# EAGLE board Qwiic Distance Sensor - VL53L1X-Panel (EAGLE 7.7.0)
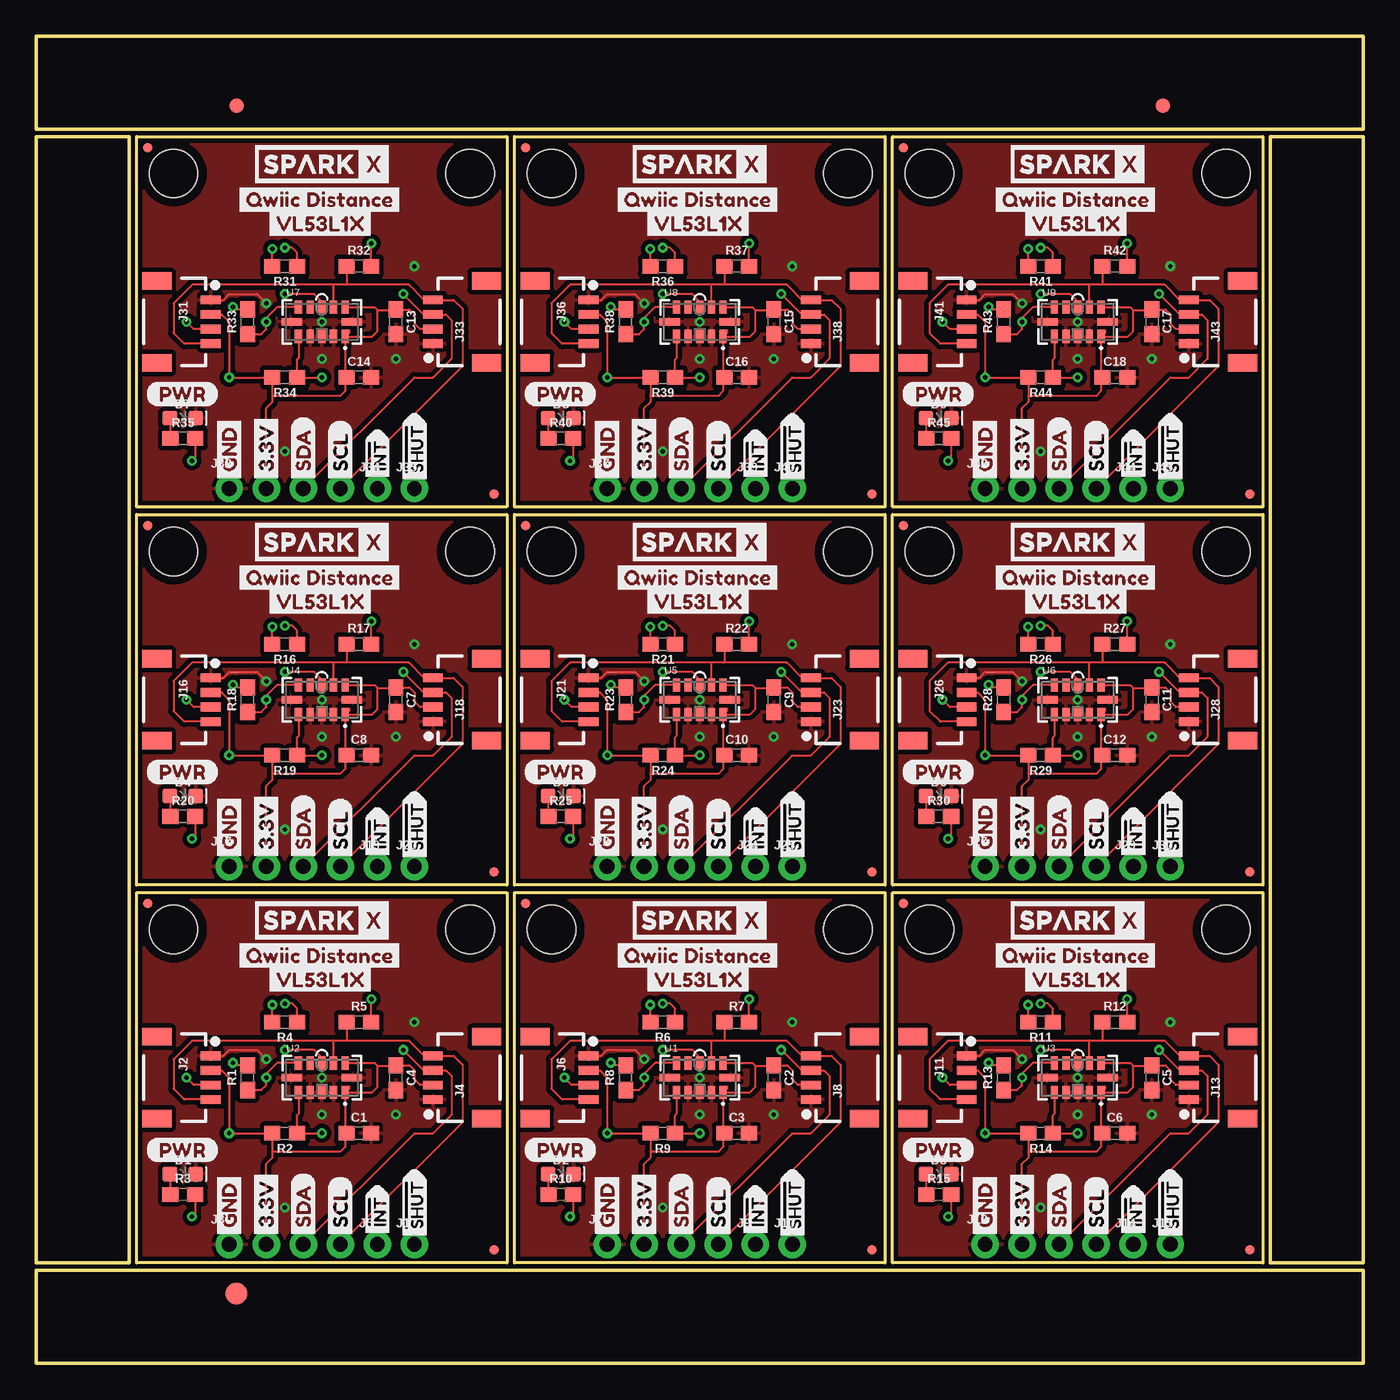
[diagram p0: board, top side]
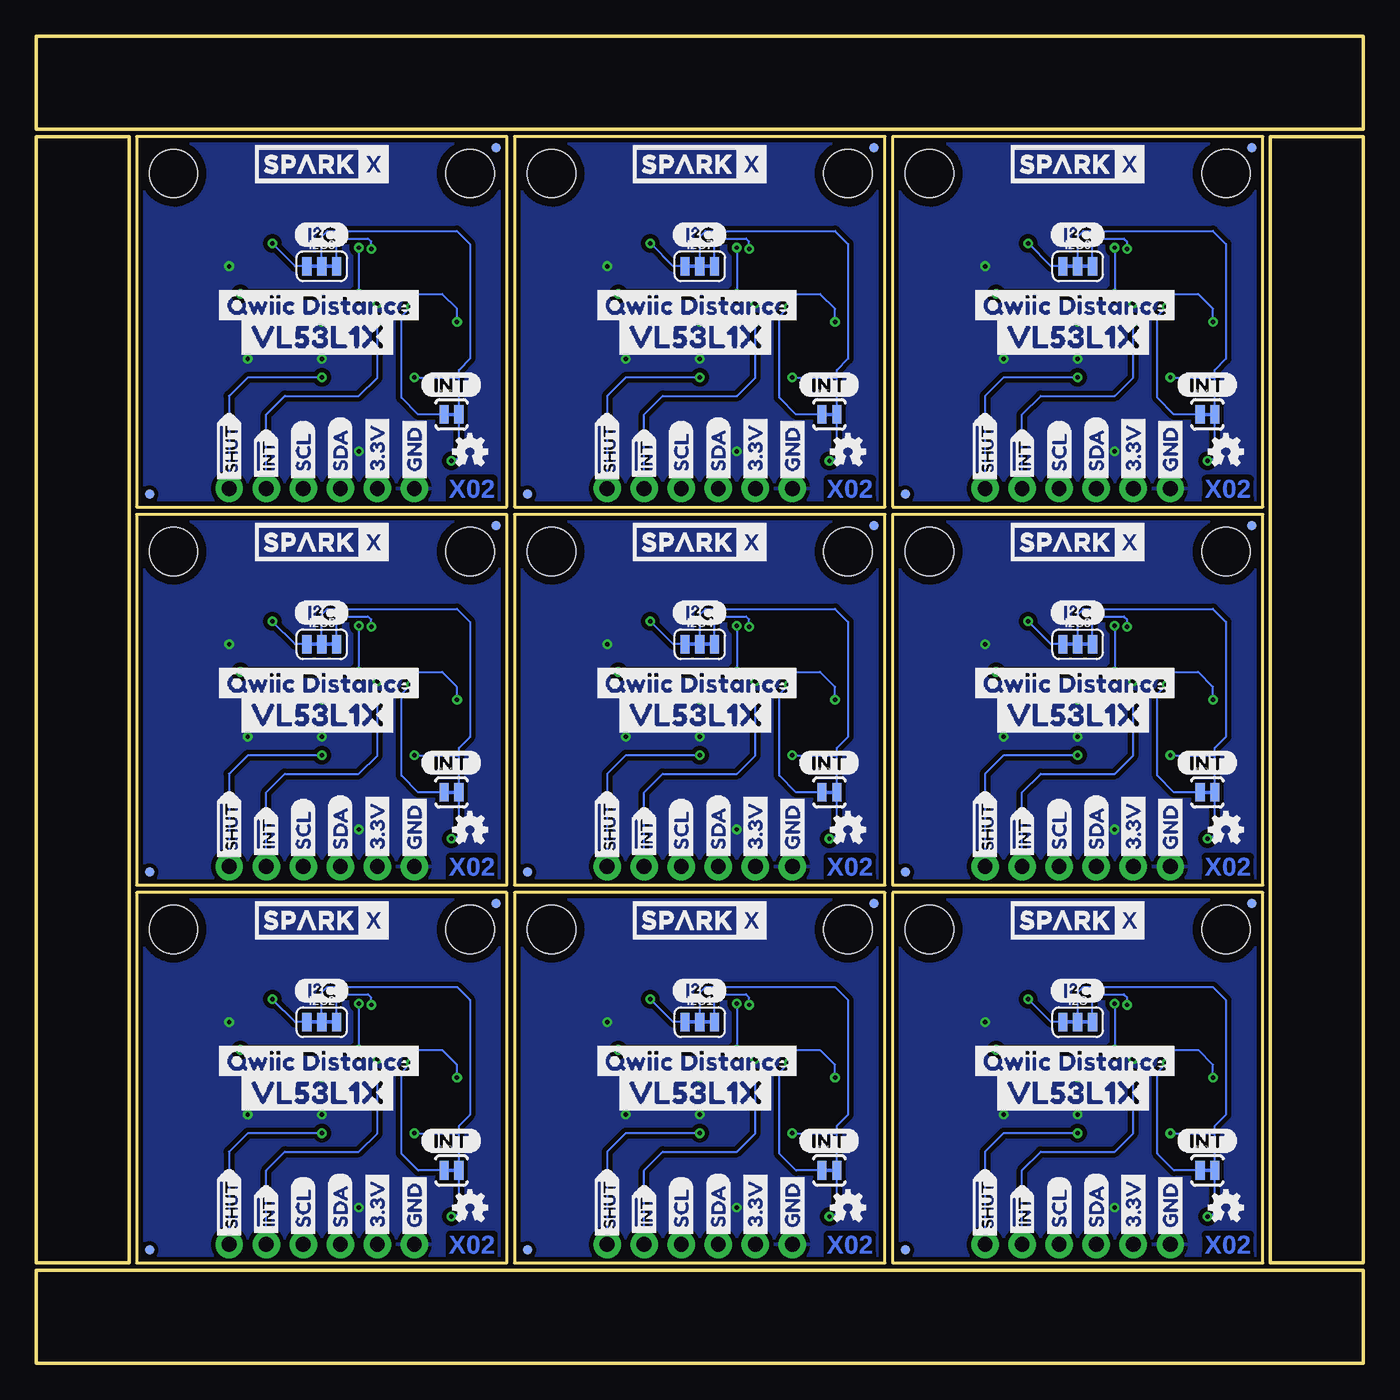
[diagram p1: board, bottom side, seen from below]

Size 90.93 x 90.93 mm. Coordinates in mm from the lower left corner, seen from the top.
Outline: 6.86,6.86 6.86,32.26 32.26,32.26 32.26,6.86 6.86,6.86
Outline: 32.77,6.86 32.77,32.26 58.17,32.26 58.17,6.86 32.77,6.86
Outline: 58.67,6.86 58.67,32.26 84.07,32.26 84.07,6.86 58.67,6.86
Outline: 6.86,32.77 6.86,58.17 32.26,58.17 32.26,32.77 6.86,32.77
Outline: 32.77,32.77 32.77,58.17 58.17,58.17 58.17,32.77 32.77,32.77
Outline: 58.67,32.77 58.67,58.17 84.07,58.17 84.07,32.77 58.67,32.77
Outline: 6.86,58.67 6.86,84.07 32.26,84.07 32.26,58.67 6.86,58.67
Outline: 32.77,58.67 32.77,84.07 58.17,84.07 58.17,58.67 32.77,58.67
Outline: 58.67,58.67 58.67,84.07 84.07,84.07 84.07,58.67 58.67,58.67
Outline: 0,6.35 90.93,6.35 90.93,0 0,0 0,6.35
Outline: 84.58,84.07 90.93,84.07 90.93,6.86 84.58,6.86 84.58,84.07
Outline: 0,90.93 90.93,90.93 90.93,84.58 0,84.58 0,90.93
Outline: 0,84.07 6.35,84.07 6.35,6.86 0,6.86 0,84.07
Copper layers (1*16): Top 0.035mm / dielectric 1.5mm / Bottom 0.035mm
Design rules "SparkFun-2-layer-PCBWay-LIMIT": minimum track width 6mil, minimum drill 0.3mm, track to track 6mil, track to pad 6mil, pad to pad 6mil, via to via 6mil, smd to smd 6mil, copper to edge 6mil, drill to drill 6mil, minimum pad ring 7mil, minimum via ring 7mil, stop-mask expansion 4mil, vias tented up to drill 25mil, thermal gap 10mil

## Footprints (pad centres in the part's own frame; a part is rotated, then mirrored left to right if it is on the bottom)
0603 = smd 1.1 x 1: 1 -0.85,0; 2 0.85,0
LED-0603 = smd 1 x 1: A -0.877,0; C 0.877,0
FIDUCIAL-1X2 = smd 1 x 1: 1 0,0
FIDUCIAL-1.5X3 = smd 1.5 x 1.5: 1 0,0
SMT-JUMPER_3_2-NC_TRACE_SILK = smd 0.635 x 1.27: 1 -1.016,0; 2 0,0; 3 1.016,0
1X01_NO_SILK = drill 1.016 pad 1.88: 1 0,0
1X04_1MM_RA = smd 0.6 x 1.35: 1 -1.5,0; 2 -0.5,0; 3 0.5,0; 4 1.5,0 | smd 1.2 x 2: NC1 2.8,-3.675; NC2 -2.8,-3.675
1X04_NO_SILK = drill 1.016 pad 1.88: 1 0,0; 2 2.54,0; 3 5.08,0; 4 7.62,0
MICRO-FIDUCIAL = smd 0.635 x 0.635: 1 0,0
STAND-OFF = hole 3.302: 0,0
PAD-JUMPER-2-NC_BY_TRACE_YES_SILK = smd 0.635 x 1.27: 1 -0.508,0; 2 0.508,0
VL53L1X = smd 0.5 x 0.9: 1 1.6,-1; 2 0.8,-1; 3 0,-1; 4 -0.8,-1; 5 -1.6,-1; 7 -1.6,1; 8 -0.8,1; 9 0,1; 10 0.8,1; 11 1.6,1 | smd 1.4 x 0.5: 6 -2.05,0; 12 2.05,0

## Placement (x,y rotation side)
C1  4.7uF  [0603]  22.1,15.75 0 top
C2  0.1uF  [0603]  50.55,19.56 270 top
C3  4.7uF  [0603]  48.01,15.75 0 top
C4  0.1uF  [0603]  24.64,19.56 270 top
C5  0.1uF  [0603]  76.45,19.56 270 top
C6  4.7uF  [0603]  73.91,15.75 0 top
C7  0.1uF  [0603]  24.64,45.47 270 top
C8  4.7uF  [0603]  22.1,41.66 0 top
C9  0.1uF  [0603]  50.55,45.47 270 top
C10  4.7uF  [0603]  48.01,41.66 0 top
C11  0.1uF  [0603]  76.45,45.47 270 top
C12  4.7uF  [0603]  73.91,41.66 0 top
C13  0.1uF  [0603]  24.64,71.37 270 top
C14  4.7uF  [0603]  22.1,67.56 0 top
C15  0.1uF  [0603]  50.55,71.37 270 top
C16  4.7uF  [0603]  48.01,67.56 0 top
C17  0.1uF  [0603]  76.45,71.37 270 top
C18  4.7uF  [0603]  73.91,67.56 0 top
D1  RED  [LED-0603]  10.03,12.95 0 top
D2  RED  [LED-0603]  35.94,12.95 0 top
D3  RED  [LED-0603]  61.85,12.95 0 top
D4  RED  [LED-0603]  10.03,38.86 0 top
D5  RED  [LED-0603]  35.94,38.86 0 top
D6  RED  [LED-0603]  61.85,38.86 0 top
D7  RED  [LED-0603]  10.03,64.77 0 top
D8  RED  [LED-0603]  35.94,64.77 0 top
D9  RED  [LED-0603]  61.85,64.77 0 top
E$1  [FIDUCIAL-1X2]  13.72,86.17 0 top
E$2  [FIDUCIAL-1X2]  77.22,86.17 0 top
E$3  [FIDUCIAL-1.5X3]  13.72,4.76 0 top
I2C  [SMT-JUMPER_3_2-NC_TRACE_SILK]  19.56,23.37 0 bottom
I2C1  [SMT-JUMPER_3_2-NC_TRACE_SILK]  45.47,23.37 0 bottom
I2C2  [SMT-JUMPER_3_2-NC_TRACE_SILK]  71.37,23.37 0 bottom
I2C3  [SMT-JUMPER_3_2-NC_TRACE_SILK]  19.56,49.28 0 bottom
I2C4  [SMT-JUMPER_3_2-NC_TRACE_SILK]  45.47,49.28 0 bottom
I2C5  [SMT-JUMPER_3_2-NC_TRACE_SILK]  71.37,49.28 0 bottom
I2C6  [SMT-JUMPER_3_2-NC_TRACE_SILK]  19.56,75.18 0 bottom
I2C7  [SMT-JUMPER_3_2-NC_TRACE_SILK]  45.47,75.18 0 bottom
I2C8  [SMT-JUMPER_3_2-NC_TRACE_SILK]  71.37,75.18 0 bottom
J1  [1X01_NO_SILK]  25.91,8.13 0 top
J2  SMD  [1X04_1MM_RA]  11.94,19.56 270 top
J3  PTH  [1X04_NO_SILK]  13.21,8.13 0 top
J4  SMD  [1X04_1MM_RA]  27.18,19.56 90 top
J5  [1X01_NO_SILK]  23.37,8.13 0 top
J6  SMD  [1X04_1MM_RA]  37.85,19.56 270 top
J7  PTH  [1X04_NO_SILK]  39.12,8.13 0 top
J8  SMD  [1X04_1MM_RA]  53.09,19.56 90 top
J9  [1X01_NO_SILK]  49.28,8.13 0 top
J10  [1X01_NO_SILK]  51.82,8.13 0 top
J11  SMD  [1X04_1MM_RA]  63.75,19.56 270 top
J12  PTH  [1X04_NO_SILK]  65.02,8.13 0 top
J13  SMD  [1X04_1MM_RA]  78.99,19.56 90 top
J14  [1X01_NO_SILK]  75.18,8.13 0 top
J15  [1X01_NO_SILK]  77.72,8.13 0 top
J16  SMD  [1X04_1MM_RA]  11.94,45.47 270 top
J17  PTH  [1X04_NO_SILK]  13.21,34.04 0 top
J18  SMD  [1X04_1MM_RA]  27.18,45.47 90 top
J19  [1X01_NO_SILK]  23.37,34.04 0 top
J20  [1X01_NO_SILK]  25.91,34.04 0 top
J21  SMD  [1X04_1MM_RA]  37.85,45.47 270 top
J22  PTH  [1X04_NO_SILK]  39.12,34.04 0 top
J23  SMD  [1X04_1MM_RA]  53.09,45.47 90 top
J24  [1X01_NO_SILK]  49.28,34.04 0 top
J25  [1X01_NO_SILK]  51.82,34.04 0 top
J26  SMD  [1X04_1MM_RA]  63.75,45.47 270 top
J27  PTH  [1X04_NO_SILK]  65.02,34.04 0 top
J28  SMD  [1X04_1MM_RA]  78.99,45.47 90 top
J29  [1X01_NO_SILK]  75.18,34.04 0 top
J30  [1X01_NO_SILK]  77.72,34.04 0 top
J31  SMD  [1X04_1MM_RA]  11.94,71.37 270 top
J32  PTH  [1X04_NO_SILK]  13.21,59.94 0 top
J33  SMD  [1X04_1MM_RA]  27.18,71.37 90 top
J34  [1X01_NO_SILK]  23.37,59.94 0 top
J35  [1X01_NO_SILK]  25.91,59.94 0 top
J36  SMD  [1X04_1MM_RA]  37.85,71.37 270 top
J37  PTH  [1X04_NO_SILK]  39.12,59.94 0 top
J38  SMD  [1X04_1MM_RA]  53.09,71.37 90 top
J39  [1X01_NO_SILK]  49.28,59.94 0 top
J40  [1X01_NO_SILK]  51.82,59.94 0 top
J41  SMD  [1X04_1MM_RA]  63.75,71.37 270 top
J42  PTH  [1X04_NO_SILK]  65.02,59.94 0 top
J43  SMD  [1X04_1MM_RA]  78.99,71.37 90 top
J44  [1X01_NO_SILK]  75.18,59.94 0 top
J45  [1X01_NO_SILK]  77.72,59.94 0 top
JP1  FIDUCIALUFIDUCIAL  [MICRO-FIDUCIAL]  7.62,31.5 0 bottom
JP2  FIDUCIALUFIDUCIAL  [MICRO-FIDUCIAL]  31.37,7.75 0 top
JP3  STAND-OFF  [STAND-OFF]  9.4,29.72 0 top
JP4  STAND-OFF  [STAND-OFF]  29.72,29.72 0 top
JP5  FIDUCIALUFIDUCIAL  [MICRO-FIDUCIAL]  31.37,7.75 0 bottom
JP6  FIDUCIALUFIDUCIAL  [MICRO-FIDUCIAL]  7.62,31.5 0 top
JP7  STAND-OFF  [STAND-OFF]  35.31,29.72 0 top
JP8  STAND-OFF  [STAND-OFF]  55.63,29.72 0 top
JP9  INT  [PAD-JUMPER-2-NC_BY_TRACE_YES_SILK]  10.67,13.21 0 bottom
JP10  FIDUCIALUFIDUCIAL  [MICRO-FIDUCIAL]  57.28,7.75 0 top
JP11  FIDUCIALUFIDUCIAL  [MICRO-FIDUCIAL]  33.53,31.5 0 top
JP12  FIDUCIALUFIDUCIAL  [MICRO-FIDUCIAL]  33.53,31.5 0 bottom
JP13  FIDUCIALUFIDUCIAL  [MICRO-FIDUCIAL]  57.28,7.75 0 bottom
JP14  INT  [PAD-JUMPER-2-NC_BY_TRACE_YES_SILK]  36.58,13.21 0 bottom
JP15  STAND-OFF  [STAND-OFF]  61.21,29.72 0 top
JP16  STAND-OFF  [STAND-OFF]  81.53,29.72 0 top
JP17  FIDUCIALUFIDUCIAL  [MICRO-FIDUCIAL]  83.19,7.75 0 top
JP18  FIDUCIALUFIDUCIAL  [MICRO-FIDUCIAL]  59.44,31.5 0 top
JP19  FIDUCIALUFIDUCIAL  [MICRO-FIDUCIAL]  59.44,31.5 0 bottom
JP20  FIDUCIALUFIDUCIAL  [MICRO-FIDUCIAL]  83.19,7.75 0 bottom
JP21  INT  [PAD-JUMPER-2-NC_BY_TRACE_YES_SILK]  62.48,13.21 0 bottom
JP22  STAND-OFF  [STAND-OFF]  9.4,55.63 0 top
JP23  STAND-OFF  [STAND-OFF]  29.72,55.63 0 top
JP24  FIDUCIALUFIDUCIAL  [MICRO-FIDUCIAL]  31.37,33.66 0 top
JP25  FIDUCIALUFIDUCIAL  [MICRO-FIDUCIAL]  7.62,57.4 0 top
JP26  FIDUCIALUFIDUCIAL  [MICRO-FIDUCIAL]  7.62,57.4 0 bottom
JP27  FIDUCIALUFIDUCIAL  [MICRO-FIDUCIAL]  31.37,33.66 0 bottom
JP28  INT  [PAD-JUMPER-2-NC_BY_TRACE_YES_SILK]  10.67,39.12 0 bottom
JP29  STAND-OFF  [STAND-OFF]  35.31,55.63 0 top
JP30  STAND-OFF  [STAND-OFF]  55.63,55.63 0 top
JP31  FIDUCIALUFIDUCIAL  [MICRO-FIDUCIAL]  57.28,33.66 0 top
JP32  FIDUCIALUFIDUCIAL  [MICRO-FIDUCIAL]  33.53,57.4 0 top
JP33  FIDUCIALUFIDUCIAL  [MICRO-FIDUCIAL]  33.53,57.4 0 bottom
JP34  FIDUCIALUFIDUCIAL  [MICRO-FIDUCIAL]  57.28,33.66 0 bottom
JP35  INT  [PAD-JUMPER-2-NC_BY_TRACE_YES_SILK]  36.58,39.12 0 bottom
JP36  STAND-OFF  [STAND-OFF]  61.21,55.63 0 top
JP37  STAND-OFF  [STAND-OFF]  81.53,55.63 0 top
JP38  FIDUCIALUFIDUCIAL  [MICRO-FIDUCIAL]  83.19,33.66 0 top
JP39  FIDUCIALUFIDUCIAL  [MICRO-FIDUCIAL]  59.44,57.4 0 top
JP40  FIDUCIALUFIDUCIAL  [MICRO-FIDUCIAL]  59.44,57.4 0 bottom
JP41  FIDUCIALUFIDUCIAL  [MICRO-FIDUCIAL]  83.19,33.66 0 bottom
JP42  INT  [PAD-JUMPER-2-NC_BY_TRACE_YES_SILK]  62.48,39.12 0 bottom
JP43  STAND-OFF  [STAND-OFF]  9.4,81.53 0 top
JP44  STAND-OFF  [STAND-OFF]  29.72,81.53 0 top
JP45  FIDUCIALUFIDUCIAL  [MICRO-FIDUCIAL]  31.37,59.56 0 top
JP46  FIDUCIALUFIDUCIAL  [MICRO-FIDUCIAL]  7.62,83.31 0 top
JP47  FIDUCIALUFIDUCIAL  [MICRO-FIDUCIAL]  7.62,83.31 0 bottom
JP48  FIDUCIALUFIDUCIAL  [MICRO-FIDUCIAL]  31.37,59.56 0 bottom
JP49  INT  [PAD-JUMPER-2-NC_BY_TRACE_YES_SILK]  10.67,65.02 0 bottom
JP50  STAND-OFF  [STAND-OFF]  35.31,81.53 0 top
JP51  STAND-OFF  [STAND-OFF]  55.63,81.53 0 top
JP52  FIDUCIALUFIDUCIAL  [MICRO-FIDUCIAL]  57.28,59.56 0 top
JP53  FIDUCIALUFIDUCIAL  [MICRO-FIDUCIAL]  33.53,83.31 0 top
JP54  FIDUCIALUFIDUCIAL  [MICRO-FIDUCIAL]  33.53,83.31 0 bottom
JP55  FIDUCIALUFIDUCIAL  [MICRO-FIDUCIAL]  57.28,59.56 0 bottom
JP56  INT  [PAD-JUMPER-2-NC_BY_TRACE_YES_SILK]  36.58,65.02 0 bottom
JP57  STAND-OFF  [STAND-OFF]  61.21,81.53 0 top
JP58  STAND-OFF  [STAND-OFF]  81.53,81.53 0 top
JP59  FIDUCIALUFIDUCIAL  [MICRO-FIDUCIAL]  83.19,59.56 0 top
JP60  FIDUCIALUFIDUCIAL  [MICRO-FIDUCIAL]  59.44,83.31 0 top
JP61  FIDUCIALUFIDUCIAL  [MICRO-FIDUCIAL]  59.44,83.31 0 bottom
JP62  FIDUCIALUFIDUCIAL  [MICRO-FIDUCIAL]  83.19,59.56 0 bottom
JP63  INT  [PAD-JUMPER-2-NC_BY_TRACE_YES_SILK]  62.48,65.02 0 bottom
LOGO1  OSHW-LOGOMINI  [OSHW-LOGO-MINI]  9.4,10.67 0 bottom
LOGO2  OSHW-LOGOMINI  [OSHW-LOGO-MINI]  35.31,10.67 0 bottom
LOGO3  OSHW-LOGOMINI  [OSHW-LOGO-MINI]  61.21,10.67 0 bottom
LOGO4  OSHW-LOGOMINI  [OSHW-LOGO-MINI]  9.4,36.58 0 bottom
LOGO5  OSHW-LOGOMINI  [OSHW-LOGO-MINI]  35.31,36.58 0 bottom
LOGO6  OSHW-LOGOMINI  [OSHW-LOGO-MINI]  61.21,36.58 0 bottom
LOGO7  OSHW-LOGOMINI  [OSHW-LOGO-MINI]  9.4,62.48 0 bottom
LOGO8  OSHW-LOGOMINI  [OSHW-LOGO-MINI]  35.31,62.48 0 bottom
LOGO9  OSHW-LOGOMINI  [OSHW-LOGO-MINI]  61.21,62.48 0 bottom
R1  10k  [0603]  14.48,19.56 90 top
R2  10k  [0603]  17.02,15.75 180 top
R3  1k  [0603]  10.03,11.56 0 top
R4  2.2k  [0603]  17.02,23.37 180 top
R5  2.2k  [0603]  22.1,23.37 0 top
R6  2.2k  [0603]  42.93,23.37 180 top
R7  2.2k  [0603]  48.01,23.37 0 top
R8  10k  [0603]  40.39,19.56 90 top
R9  10k  [0603]  42.93,15.75 180 top
R10  1k  [0603]  35.94,11.56 0 top
R11  2.2k  [0603]  68.83,23.37 180 top
R12  2.2k  [0603]  73.91,23.37 0 top
R13  10k  [0603]  66.29,19.56 90 top
R14  10k  [0603]  68.83,15.75 180 top
R15  1k  [0603]  61.85,11.56 0 top
R16  2.2k  [0603]  17.02,49.28 180 top
R17  2.2k  [0603]  22.1,49.28 0 top
R18  10k  [0603]  14.48,45.47 90 top
R19  10k  [0603]  17.02,41.66 180 top
R20  1k  [0603]  10.03,37.46 0 top
R21  2.2k  [0603]  42.93,49.28 180 top
R22  2.2k  [0603]  48.01,49.28 0 top
R23  10k  [0603]  40.39,45.47 90 top
R24  10k  [0603]  42.93,41.66 180 top
R25  1k  [0603]  35.94,37.46 0 top
R26  2.2k  [0603]  68.83,49.28 180 top
R27  2.2k  [0603]  73.91,49.28 0 top
R28  10k  [0603]  66.29,45.47 90 top
R29  10k  [0603]  68.83,41.66 180 top
R30  1k  [0603]  61.85,37.46 0 top
R31  2.2k  [0603]  17.02,75.18 180 top
R32  2.2k  [0603]  22.1,75.18 0 top
R33  10k  [0603]  14.48,71.37 90 top
R34  10k  [0603]  17.02,67.56 180 top
R35  1k  [0603]  10.03,63.37 0 top
R36  2.2k  [0603]  42.93,75.18 180 top
R37  2.2k  [0603]  48.01,75.18 0 top
R38  10k  [0603]  40.39,71.37 90 top
R39  10k  [0603]  42.93,67.56 180 top
R40  1k  [0603]  35.94,63.37 0 top
R41  2.2k  [0603]  68.83,75.18 180 top
R42  2.2k  [0603]  73.91,75.18 0 top
R43  10k  [0603]  66.29,71.37 90 top
R44  10k  [0603]  68.83,67.56 180 top
R45  1k  [0603]  61.85,63.37 0 top
U1  VL53L1XSMD  [VL53L1X]  45.47,19.56 0 top
U2  VL53L1XSMD  [VL53L1X]  19.56,19.56 0 top
U3  VL53L1XSMD  [VL53L1X]  71.37,19.56 0 top
U4  VL53L1XSMD  [VL53L1X]  19.56,45.47 0 top
U5  VL53L1XSMD  [VL53L1X]  45.47,45.47 0 top
U6  VL53L1XSMD  [VL53L1X]  71.37,45.47 0 top
U7  VL53L1XSMD  [VL53L1X]  19.56,71.37 0 top
U8  VL53L1XSMD  [VL53L1X]  45.47,71.37 0 top
U9  VL53L1XSMD  [VL53L1X]  71.37,71.37 0 top
U$1  SPARKX-LOGO4  [SPARKX-MEDIUM]  19.56,30.35 0 top
U$2  SPARKX-LOGO4  [SPARKX-MEDIUM]  19.56,30.35 0 bottom
U$3  [GND1]  13.21,8.38 90 bottom
U$4  [3#3V2]  15.75,8.38 90 bottom
U$5  [SDA8]  18.29,8.38 90 bottom
U$6  [SCL9]  20.83,8.38 90 bottom
U$7  [#INT14]  23.37,8.25 90 bottom
U$8  [#SHUT15]  25.91,8.13 90 top
U$9  [#SHUT15]  25.91,8.13 90 bottom
U$10  [(PWR)]  7.49,14.61 0 top
U$11  [(I_SUPER2_C)]  21.46,25.53 0 bottom
U$12  [(INT)]  12.83,15.24 0 bottom
U$13  SPARKX-LOGO4  [SPARKX-MEDIUM]  45.47,30.35 0 bottom
U$14  SPARKX-LOGO4  [SPARKX-MEDIUM]  45.47,30.35 0 top
U$15  [QWIIC_DISTANCE7]  27.18,20.7 0 bottom
U$16  [VL53L1X8]  25.78,18.54 0 bottom
U$17  [QWIIC_DISTANCE7]  53.09,20.7 0 bottom
U$18  [VL53L1X8]  51.69,18.54 0 bottom
U$19  [QWIIC_DISTANCE9]  13.46,27.94 0 top
U$20  [VL53L1X10]  15.49,26.29 0 top
U$21  [3#3V2]  15.75,8.38 90 top
U$22  [GND1]  13.21,8.38 90 top
U$23  [QWIIC_DISTANCE9]  39.37,27.94 0 top
U$24  [VL53L1X10]  41.4,26.29 0 top
U$25  [#INT14]  23.37,8.25 90 top
U$26  [SCL9]  20.83,8.38 90 top
U$27  [SDA8]  18.29,8.38 90 top
U$28  [3#3V2]  41.66,8.38 90 top
U$29  [GND1]  39.12,8.38 90 top
U$30  [#INT14]  49.28,8.25 90 top
U$31  [SCL9]  46.74,8.38 90 top
U$32  [SDA8]  44.2,8.38 90 top
U$33  [GND1]  39.12,8.38 90 bottom
U$34  [3#3V2]  41.66,8.38 90 bottom
U$35  [SDA8]  44.2,8.38 90 bottom
U$36  [SCL9]  46.74,8.38 90 bottom
U$37  [#INT14]  49.28,8.25 90 bottom
U$38  [#SHUT15]  51.82,8.13 90 top
U$39  [#SHUT15]  51.82,8.13 90 bottom
U$40  [(PWR)]  33.4,14.61 0 top
U$41  [(I_SUPER2_C)]  47.37,25.53 0 bottom
U$42  [(INT)]  38.73,15.24 0 bottom
U$43  SPARKX-LOGO4  [SPARKX-MEDIUM]  71.37,30.35 0 bottom
U$44  SPARKX-LOGO4  [SPARKX-MEDIUM]  71.37,30.35 0 top
U$45  [QWIIC_DISTANCE7]  78.99,20.7 0 bottom
U$46  [VL53L1X8]  77.6,18.54 0 bottom
U$47  [QWIIC_DISTANCE9]  65.28,27.94 0 top
U$48  [VL53L1X10]  67.31,26.29 0 top
U$49  [3#3V2]  67.56,8.38 90 top
U$50  [GND1]  65.02,8.38 90 top
U$51  [#INT14]  75.18,8.25 90 top
U$52  [SCL9]  72.64,8.38 90 top
U$53  [SDA8]  70.1,8.38 90 top
U$54  [GND1]  65.02,8.38 90 bottom
U$55  [3#3V2]  67.56,8.38 90 bottom
U$56  [SDA8]  70.1,8.38 90 bottom
U$57  [SCL9]  72.64,8.38 90 bottom
U$58  [#INT14]  75.18,8.25 90 bottom
U$59  [#SHUT15]  77.72,8.13 90 top
U$60  [#SHUT15]  77.72,8.13 90 bottom
U$61  [(PWR)]  59.31,14.61 0 top
U$62  [(I_SUPER2_C)]  73.28,25.53 0 bottom
U$63  [(INT)]  64.64,15.24 0 bottom
U$64  SPARKX-LOGO4  [SPARKX-MEDIUM]  19.56,56.26 0 bottom
U$65  SPARKX-LOGO4  [SPARKX-MEDIUM]  19.56,56.26 0 top
U$66  [QWIIC_DISTANCE7]  27.18,46.61 0 bottom
U$67  [VL53L1X8]  25.78,44.45 0 bottom
U$68  [QWIIC_DISTANCE9]  13.46,53.85 0 top
U$69  [VL53L1X10]  15.49,52.2 0 top
U$70  [3#3V2]  15.75,34.29 90 top
U$71  [GND1]  13.21,34.29 90 top
U$72  [#INT14]  23.37,34.16 90 top
U$73  [SCL9]  20.83,34.29 90 top
U$74  [SDA8]  18.29,34.29 90 top
U$75  [GND1]  13.21,34.29 90 bottom
U$76  [3#3V2]  15.75,34.29 90 bottom
U$77  [SDA8]  18.29,34.29 90 bottom
U$78  [SCL9]  20.83,34.29 90 bottom
U$79  [#INT14]  23.37,34.16 90 bottom
U$80  [#SHUT15]  25.91,34.04 90 top
U$81  [#SHUT15]  25.91,34.04 90 bottom
U$82  [(PWR)]  7.49,40.51 0 top
U$83  [(I_SUPER2_C)]  21.46,51.43 0 bottom
U$84  [(INT)]  12.83,41.15 0 bottom
U$85  SPARKX-LOGO4  [SPARKX-MEDIUM]  45.47,56.26 0 bottom
U$86  SPARKX-LOGO4  [SPARKX-MEDIUM]  45.47,56.26 0 top
U$87  [QWIIC_DISTANCE7]  53.09,46.61 0 bottom
U$88  [VL53L1X8]  51.69,44.45 0 bottom
U$89  [QWIIC_DISTANCE9]  39.37,53.85 0 top
U$90  [VL53L1X10]  41.4,52.2 0 top
U$91  [3#3V2]  41.66,34.29 90 top
U$92  [GND1]  39.12,34.29 90 top
U$93  [#INT14]  49.28,34.16 90 top
U$94  [SCL9]  46.74,34.29 90 top
U$95  [SDA8]  44.2,34.29 90 top
U$96  [GND1]  39.12,34.29 90 bottom
U$97  [3#3V2]  41.66,34.29 90 bottom
U$98  [SDA8]  44.2,34.29 90 bottom
U$99  [SCL9]  46.74,34.29 90 bottom
U$100  [#INT14]  49.28,34.16 90 bottom
U$101  [#SHUT15]  51.82,34.04 90 top
U$102  [#SHUT15]  51.82,34.04 90 bottom
U$103  [(PWR)]  33.4,40.51 0 top
U$104  [(I_SUPER2_C)]  47.37,51.43 0 bottom
U$105  [(INT)]  38.73,41.15 0 bottom
U$106  SPARKX-LOGO4  [SPARKX-MEDIUM]  71.37,56.26 0 bottom
U$107  SPARKX-LOGO4  [SPARKX-MEDIUM]  71.37,56.26 0 top
U$108  [QWIIC_DISTANCE7]  78.99,46.61 0 bottom
U$109  [VL53L1X8]  77.6,44.45 0 bottom
U$110  [QWIIC_DISTANCE9]  65.28,53.85 0 top
U$111  [VL53L1X10]  67.31,52.2 0 top
U$112  [3#3V2]  67.56,34.29 90 top
U$113  [GND1]  65.02,34.29 90 top
U$114  [#INT14]  75.18,34.16 90 top
U$115  [SCL9]  72.64,34.29 90 top
U$116  [SDA8]  70.1,34.29 90 top
U$117  [GND1]  65.02,34.29 90 bottom
U$118  [3#3V2]  67.56,34.29 90 bottom
U$119  [SDA8]  70.1,34.29 90 bottom
U$120  [SCL9]  72.64,34.29 90 bottom
U$121  [#INT14]  75.18,34.16 90 bottom
U$122  [#SHUT15]  77.72,34.04 90 top
U$123  [#SHUT15]  77.72,34.04 90 bottom
U$124  [(PWR)]  59.31,40.51 0 top
U$125  [(I_SUPER2_C)]  73.28,51.43 0 bottom
U$126  [(INT)]  64.64,41.15 0 bottom
U$127  SPARKX-LOGO4  [SPARKX-MEDIUM]  19.56,82.17 0 bottom
U$128  SPARKX-LOGO4  [SPARKX-MEDIUM]  19.56,82.17 0 top
U$129  [QWIIC_DISTANCE7]  27.18,72.52 0 bottom
U$130  [VL53L1X8]  25.78,70.36 0 bottom
U$131  [QWIIC_DISTANCE9]  13.46,79.76 0 top
U$132  [VL53L1X10]  15.49,78.11 0 top
U$133  [3#3V2]  15.75,60.2 90 top
U$134  [GND1]  13.21,60.2 90 top
U$135  [#INT14]  23.37,60.07 90 top
U$136  [SCL9]  20.83,60.2 90 top
U$137  [SDA8]  18.29,60.2 90 top
U$138  [GND1]  13.21,60.2 90 bottom
U$139  [3#3V2]  15.75,60.2 90 bottom
U$140  [SDA8]  18.29,60.2 90 bottom
U$141  [SCL9]  20.83,60.2 90 bottom
U$142  [#INT14]  23.37,60.07 90 bottom
U$143  [#SHUT15]  25.91,59.94 90 top
U$144  [#SHUT15]  25.91,59.94 90 bottom
U$145  [(PWR)]  7.49,66.42 0 top
U$146  [(I_SUPER2_C)]  21.46,77.34 0 bottom
U$147  [(INT)]  12.83,67.06 0 bottom
U$148  SPARKX-LOGO4  [SPARKX-MEDIUM]  45.47,82.17 0 bottom
U$149  SPARKX-LOGO4  [SPARKX-MEDIUM]  45.47,82.17 0 top
U$150  [QWIIC_DISTANCE7]  53.09,72.52 0 bottom
U$151  [VL53L1X8]  51.69,70.36 0 bottom
U$152  [QWIIC_DISTANCE9]  39.37,79.76 0 top
U$153  [VL53L1X10]  41.4,78.11 0 top
U$154  [3#3V2]  41.66,60.2 90 top
U$155  [GND1]  39.12,60.2 90 top
U$156  [#INT14]  49.28,60.07 90 top
U$157  [SCL9]  46.74,60.2 90 top
U$158  [SDA8]  44.2,60.2 90 top
U$159  [GND1]  39.12,60.2 90 bottom
U$160  [3#3V2]  41.66,60.2 90 bottom
U$161  [SDA8]  44.2,60.2 90 bottom
U$162  [SCL9]  46.74,60.2 90 bottom
U$163  [#INT14]  49.28,60.07 90 bottom
U$164  [#SHUT15]  51.82,59.94 90 top
U$165  [#SHUT15]  51.82,59.94 90 bottom
U$166  [(PWR)]  33.4,66.42 0 top
U$167  [(I_SUPER2_C)]  47.37,77.34 0 bottom
U$168  [(INT)]  38.73,67.06 0 bottom
U$169  SPARKX-LOGO4  [SPARKX-MEDIUM]  71.37,82.17 0 bottom
U$170  SPARKX-LOGO4  [SPARKX-MEDIUM]  71.37,82.17 0 top
U$171  [QWIIC_DISTANCE7]  78.99,72.52 0 bottom
U$172  [VL53L1X8]  77.6,70.36 0 bottom
U$173  [QWIIC_DISTANCE9]  65.28,79.76 0 top
U$174  [VL53L1X10]  67.31,78.11 0 top
U$175  [3#3V2]  67.56,60.2 90 top
U$176  [GND1]  65.02,60.2 90 top
U$177  [#INT14]  75.18,60.07 90 top
U$178  [SCL9]  72.64,60.2 90 top
U$179  [SDA8]  70.1,60.2 90 top
U$180  [GND1]  65.02,60.2 90 bottom
U$181  [3#3V2]  67.56,60.2 90 bottom
U$182  [SDA8]  70.1,60.2 90 bottom
U$183  [SCL9]  72.64,60.2 90 bottom
U$184  [#INT14]  75.18,60.07 90 bottom
U$185  [#SHUT15]  77.72,59.94 90 top
U$186  [#SHUT15]  77.72,59.94 90 bottom
U$187  [(PWR)]  59.31,66.42 0 top
U$188  [(I_SUPER2_C)]  73.28,77.34 0 bottom
U$189  [(INT)]  64.64,67.06 0 bottom

## Library data of the parts
C1 C3 C6 C8 C10 C12 C14 C16 C18 = SparkFun-Capacitors; PROD_ID: CAP-08280
C2 C4 C5 C7 C9 C11 C13 C15 C17 = SparkFun-Capacitors; PROD_ID: CAP-00810
D1-D9 = SparkFun-LED; PROD_ID: DIO-00819
E$1 E$2 LOGO1-LOGO9 = SparkFun-Aesthetics
E$3 = SparkFun-Retired
I2C I2C1-I2C8 = SparkFun-Jumpers
J1 J5 J9 J10 J14 J15 J19 J20 J24 J25 J29 J30 J34 J35 J39 J40 J44 J45 = SparkFun-Connectors
J2-J4 J6-J8 J11-J13 J16-J18 J21-J23 J26-J28 J31-J33 J36-J38 J41-J43 U$1 U$2 U$13 U$14 U$43 U$44 U$64 U$65 U$85 U$86 U$106 U$107 U$127 U$128 U$148 U$149 U$169 U$170 = SparkX
JP1-JP8 JP10-JP13 JP15-JP20 JP22-JP27 JP29-JP34 JP36-JP41 JP43-JP48 JP50-JP55 JP57-JP62 = SparkFun
JP9 JP14 JP21 JP28 JP35 JP42 JP49 JP56 JP63 = SparkFun-Passives
R1 R2 R8 R9 R13 R14 R18 R19 R23 R24 R28 R29 R33 R34 R38 R39 R43 R44 = SparkFun-Resistors; PROD_ID: RES-00824
R3 R10 R15 R20 R25 R30 R35 R40 R45 = SparkFun-Resistors; PROD_ID: RES-07856
R4-R7 R11 R12 R16 R17 R21 R22 R26 R27 R31 R32 R36 R37 R41 R42 = SparkFun-Resistors; PROD_ID: RES-08272
U1-U9 = VL53L1X
U$3-U$7 U$10-U$12 U$21 U$22 U$25-U$37 U$40-U$42 U$49-U$58 U$61-U$63 U$70-U$79 U$82-U$84 U$91-U$100 U$103-U$105 U$112-U$121 U$124-U$126 U$133-U$142 U$145-U$147 U$154-U$163 U$166-U$168 U$175-U$184 U$187-U$189 = Labels-0_04
U$8 U$9 U$38 U$39 U$59 U$60 U$80 U$81 U$101 U$102 U$122 U$123 U$143 U$144 U$164 U$165 U$185 U$186 = buzzard_labels (16)
U$15-U$18 U$45 U$46 U$66 U$67 U$87 U$88 U$108 U$109 U$129 U$130 U$150 U$151 U$171 U$172 = buzzard_labels (14)
U$19 U$20 U$23 U$24 U$47 U$48 U$68 U$69 U$89 U$90 U$110 U$111 U$131 U$132 U$152 U$153 U$173 U$174 = buzzard_labels (15)

## Nets
3.3V: C1.1 C4.1 I2C.2 J2.2 J3.2 J4.2 JP9.2 R2.2 R3.2 U2.1 U2.11
3.3V1: C2.1 C3.1 I2C1.2 J6.2 J7.2 J8.2 JP14.2 R9.2 R10.2 U1.1 U1.11
3.3V2: C5.1 C6.1 I2C2.2 J11.2 J12.2 J13.2 JP21.2 R14.2 R15.2 U3.1 U3.11
3.3V3: C7.1 C8.1 I2C3.2 J16.2 J17.2 J18.2 JP28.2 R19.2 R20.2 U4.1 U4.11
3.3V4: C9.1 C10.1 I2C4.2 J21.2 J22.2 J23.2 JP35.2 R24.2 R25.2 U5.1 U5.11
3.3V5: C11.1 C12.1 I2C5.2 J26.2 J27.2 J28.2 JP42.2 R29.2 R30.2 U6.1 U6.11
3.3V6: C13.1 C14.1 I2C6.2 J31.2 J32.2 J33.2 JP49.2 R34.2 R35.2 U7.1 U7.11
3.3V7: C15.1 C16.1 I2C7.2 J36.2 J37.2 J38.2 JP56.2 R39.2 R40.2 U8.1 U8.11
3.3V8: C17.1 C18.1 I2C8.2 J41.2 J42.2 J43.2 JP63.2 R44.2 R45.2 U9.1 U9.11
!INT: J5.1 R1.1 U2.7
!INT1: J9.1 R8.1 U1.7
!INT2: J14.1 R13.1 U3.7
!INT3: J19.1 R18.1 U4.7
!INT4: J24.1 R23.1 U5.7
!INT5: J29.1 R28.1 U6.7
!INT6: J34.1 R33.1 U7.7
!INT7: J39.1 R38.1 U8.7
!INT8: J44.1 R43.1 U9.7
!SHUT: J1.1 R2.1 U2.5
!SHUT1: J10.1 R9.1 U1.5
!SHUT2: J15.1 R14.1 U3.5
!SHUT3: J20.1 R19.1 U4.5
!SHUT4: J25.1 R24.1 U5.5
!SHUT5: J30.1 R29.1 U6.5
!SHUT6: J35.1 R34.1 U7.5
!SHUT7: J40.1 R39.1 U8.5
!SHUT8: J45.1 R44.1 U9.5
GND: C1.2 C4.2 D1.C J2.1 J3.1 J4.1 U2.2 U2.3 U2.4 U2.6 U2.12
GND1: C2.2 C3.2 D2.C J6.1 J7.1 J8.1 U1.2 U1.3 U1.4 U1.6 U1.12
GND2: C5.2 C6.2 D3.C J11.1 J12.1 J13.1 U3.2 U3.3 U3.4 U3.6 U3.12
GND3: C7.2 C8.2 D4.C J16.1 J17.1 J18.1 U4.2 U4.3 U4.4 U4.6 U4.12
GND4: C9.2 C10.2 D5.C J21.1 J22.1 J23.1 U5.2 U5.3 U5.4 U5.6 U5.12
GND5: C11.2 C12.2 D6.C J26.1 J27.1 J28.1 U6.2 U6.3 U6.4 U6.6 U6.12
GND6: C13.2 C14.2 D7.C J31.1 J32.1 J33.1 U7.2 U7.3 U7.4 U7.6 U7.12
GND7: C15.2 C16.2 D8.C J36.1 J37.1 J38.1 U8.2 U8.3 U8.4 U8.6 U8.12
GND8: C17.2 C18.2 D9.C J41.1 J42.1 J43.1 U9.2 U9.3 U9.4 U9.6 U9.12
N$1: I2C.1 R5.2
N$2: I2C.3 R4.2
N$3: D1.A R3.1
N$4: JP9.1 R1.2
N$5: I2C1.1 R7.2
N$6: I2C1.3 R6.2
N$7: JP14.1 R8.2
N$8: D2.A R10.1
N$9: I2C2.1 R12.2
N$10: I2C2.3 R11.2
N$11: JP21.1 R13.2
N$12: D3.A R15.1
N$13: I2C3.1 R17.2
N$14: I2C3.3 R16.2
N$15: JP28.1 R18.2
N$16: D4.A R20.1
N$17: I2C4.1 R22.2
N$18: I2C4.3 R21.2
N$19: JP35.1 R23.2
N$20: D5.A R25.1
N$21: I2C5.1 R27.2
N$22: I2C5.3 R26.2
N$23: JP42.1 R28.2
N$24: D6.A R30.1
N$25: I2C6.1 R32.2
N$26: I2C6.3 R31.2
N$27: JP49.1 R33.2
N$28: D7.A R35.1
N$29: I2C7.1 R37.2
N$30: I2C7.3 R36.2
N$31: JP56.1 R38.2
N$32: D8.A R40.1
N$33: I2C8.1 R42.2
N$34: I2C8.3 R41.2
N$35: JP63.1 R43.2
N$36: D9.A R45.1
SCL: J2.4 J3.4 J4.4 R5.1 U2.10
SCL1: J6.4 J7.4 J8.4 R7.1 U1.10
SCL2: J11.4 J12.4 J13.4 R12.1 U3.10
SCL3: J16.4 J17.4 J18.4 R17.1 U4.10
SCL4: J21.4 J22.4 J23.4 R22.1 U5.10
SCL5: J26.4 J27.4 J28.4 R27.1 U6.10
SCL6: J31.4 J32.4 J33.4 R32.1 U7.10
SCL7: J36.4 J37.4 J38.4 R37.1 U8.10
SCL8: J41.4 J42.4 J43.4 R42.1 U9.10
SDA: J2.3 J3.3 J4.3 R4.1 U2.9
SDA1: J6.3 J7.3 J8.3 R6.1 U1.9
SDA2: J11.3 J12.3 J13.3 R11.1 U3.9
SDA3: J16.3 J17.3 J18.3 R16.1 U4.9
SDA4: J21.3 J22.3 J23.3 R21.1 U5.9
SDA5: J26.3 J27.3 J28.3 R26.1 U6.9
SDA6: J31.3 J32.3 J33.3 R31.1 U7.9
SDA7: J36.3 J37.3 J38.3 R36.1 U8.9
SDA8: J41.3 J42.3 J43.3 R41.1 U9.9

## Tracks (layer width: path | path; a pad name or v marks a point on that pad's centre or on a via)
3.3V  (via drill 0.3)
  Top 0.152: J4.2 26.28,19.06 25.91,19.43 25.91,20.07 25.57,20.41 C4.1 24.6,20.37 23.37,20.37 | 21.16,15.84 U2.1 23,18.56 23.37,18.92 23.37,20.37 | 21.16,15.84 C1.1 | J3.2 15.75,13.64 16.17,14.06 16.17,14.48 | J2.2 12.71,20.06 13.21,19.56 v13.21,15.75 R2.2 16.17,14.48 | 21.16,15.84 21.16,14.81 20.83,14.48 16.17,14.48 | U2.11 23.18,20.56 23.37,20.37 | R3.2 10.88,10.25 v10.67,10.03
  Bottom 0.152: v13.21,15.75 10.16,15.75 | 10.16,15.75 JP9.2 10.16,10.29 10.41,10.03 v10.67,10.03 | 10.16,15.75 10.16,16.26 9.4,17.02 9.4,24.89 10.29,25.78 19.18,25.78 19.56,25.4 I2C.2
3.3V1  (via drill 0.3)
  Top 0.152: J8.2 52.19,19.06 51.82,19.43 51.82,20.07 51.47,20.41 C2.1 50.51,20.37 49.28,20.37 | 47.07,15.84 U1.1 48.91,18.56 49.28,18.92 49.28,20.37 | 47.07,15.84 C3.1 | J7.2 41.66,13.64 42.08,14.06 42.08,14.48 | J6.2 38.62,20.06 39.12,19.56 v39.12,15.75 R9.2 42.08,14.48 | 47.07,15.84 47.07,14.81 46.74,14.48 42.08,14.48 | U1.11 49.09,20.56 49.28,20.37 | R10.2 36.79,10.25 v36.58,10.03
  Bottom 0.152: v39.12,15.75 36.07,15.75 | 36.07,15.75 JP14.2 36.07,10.29 36.32,10.03 v36.58,10.03 | 36.07,15.75 36.07,16.26 35.31,17.02 35.31,24.89 36.2,25.78 45.08,25.78 45.47,25.4 I2C1.2
3.3V2  (via drill 0.3)
  Top 0.152: J13.2 78.1,19.06 77.72,19.43 77.72,20.07 77.38,20.41 C5.1 76.42,20.37 75.18,20.37 | 72.97,15.84 U3.1 74.82,18.56 75.18,18.92 75.18,20.37 | 72.97,15.84 C6.1 | J12.2 67.56,13.64 67.98,14.06 67.98,14.48 | J11.2 64.52,20.06 65.02,19.56 v65.02,15.75 R14.2 67.98,14.48 | 72.97,15.84 72.97,14.81 72.64,14.48 67.98,14.48 | U3.11 75,20.56 75.18,20.37 | R15.2 62.7,10.25 v62.48,10.03
  Bottom 0.152: v65.02,15.75 61.98,15.75 | 61.98,15.75 JP21.2 61.98,10.29 62.23,10.03 v62.48,10.03 | 61.98,15.75 61.98,16.26 61.21,17.02 61.21,24.89 62.1,25.78 70.99,25.78 71.37,25.4 I2C2.2
3.3V3  (via drill 0.3)
  Top 0.152: J18.2 26.28,44.97 25.91,45.34 25.91,45.97 25.57,46.32 C7.1 24.6,46.28 23.37,46.28 | 21.16,41.75 U4.1 23,44.47 23.37,44.83 23.37,46.28 | 21.16,41.75 C8.1 | J17.2 15.75,39.55 16.17,39.97 16.17,40.39 | J16.2 12.71,45.97 13.21,45.47 v13.21,41.66 R19.2 16.17,40.39 | 21.16,41.75 21.16,40.72 20.83,40.39 16.17,40.39 | U4.11 23.18,46.47 23.37,46.28 | R20.2 10.88,36.16 v10.67,35.94
  Bottom 0.152: v13.21,41.66 10.16,41.66 | 10.16,41.66 JP28.2 10.16,36.2 10.41,35.94 v10.67,35.94 | 10.16,41.66 10.16,42.16 9.4,42.93 9.4,50.8 10.29,51.69 19.18,51.69 19.56,51.31 I2C3.2
3.3V4  (via drill 0.3)
  Top 0.152: J23.2 52.19,44.97 51.82,45.34 51.82,45.97 51.47,46.32 C9.1 50.51,46.28 49.28,46.28 | 47.07,41.75 U5.1 48.91,44.47 49.28,44.83 49.28,46.28 | 47.07,41.75 C10.1 | J22.2 41.66,39.55 42.08,39.97 42.08,40.39 | J21.2 38.62,45.97 39.12,45.47 v39.12,41.66 R24.2 42.08,40.39 | 47.07,41.75 47.07,40.72 46.74,40.39 42.08,40.39 | U5.11 49.09,46.47 49.28,46.28 | R25.2 36.79,36.16 v36.58,35.94
  Bottom 0.152: v39.12,41.66 36.07,41.66 | 36.07,41.66 JP35.2 36.07,36.2 36.32,35.94 v36.58,35.94 | 36.07,41.66 36.07,42.16 35.31,42.93 35.31,50.8 36.2,51.69 45.08,51.69 45.47,51.31 I2C4.2
3.3V5  (via drill 0.3)
  Top 0.152: J28.2 78.1,44.97 77.72,45.34 77.72,45.97 77.38,46.32 C11.1 76.42,46.28 75.18,46.28 | 72.97,41.75 U6.1 74.82,44.47 75.18,44.83 75.18,46.28 | 72.97,41.75 C12.1 | J27.2 67.56,39.55 67.98,39.97 67.98,40.39 | J26.2 64.52,45.97 65.02,45.47 v65.02,41.66 R29.2 67.98,40.39 | 72.97,41.75 72.97,40.72 72.64,40.39 67.98,40.39 | U6.11 75,46.47 75.18,46.28 | R30.2 62.7,36.16 v62.48,35.94
  Bottom 0.152: v65.02,41.66 61.98,41.66 | 61.98,41.66 JP42.2 61.98,36.2 62.23,35.94 v62.48,35.94 | 61.98,41.66 61.98,42.16 61.21,42.93 61.21,50.8 62.1,51.69 70.99,51.69 71.37,51.31 I2C5.2
3.3V6  (via drill 0.3)
  Top 0.152: J33.2 26.28,70.87 25.91,71.25 25.91,71.88 25.57,72.22 C13.1 24.6,72.19 23.37,72.19 | 21.16,67.65 U7.1 23,70.37 23.37,70.74 23.37,72.19 | 21.16,67.65 C14.1 | J32.2 15.75,65.45 16.17,65.87 16.17,66.29 | J31.2 12.71,71.87 13.21,71.37 v13.21,67.56 R34.2 16.17,66.29 | 21.16,67.65 21.16,66.62 20.83,66.29 16.17,66.29 | U7.11 23.18,72.37 23.37,72.19 | R35.2 10.88,62.06 v10.67,61.85
  Bottom 0.152: v13.21,67.56 10.16,67.56 | 10.16,67.56 JP49.2 10.16,62.1 10.41,61.85 v10.67,61.85 | 10.16,67.56 10.16,68.07 9.4,68.83 9.4,76.71 10.29,77.6 19.18,77.6 19.56,77.22 I2C6.2
3.3V7  (via drill 0.3)
  Top 0.152: J38.2 52.19,70.87 51.82,71.25 51.82,71.88 51.47,72.22 C15.1 50.51,72.19 49.28,72.19 | 47.07,67.65 U8.1 48.91,70.37 49.28,70.74 49.28,72.19 | 47.07,67.65 C16.1 | J37.2 41.66,65.45 42.08,65.87 42.08,66.29 | J36.2 38.62,71.87 39.12,71.37 v39.12,67.56 R39.2 42.08,66.29 | 47.07,67.65 47.07,66.62 46.74,66.29 42.08,66.29 | U8.11 49.09,72.37 49.28,72.19 | R40.2 36.79,62.06 v36.58,61.85
  Bottom 0.152: v39.12,67.56 36.07,67.56 | 36.07,67.56 JP56.2 36.07,62.1 36.32,61.85 v36.58,61.85 | 36.07,67.56 36.07,68.07 35.31,68.83 35.31,76.71 36.2,77.6 45.08,77.6 45.47,77.22 I2C7.2
3.3V8  (via drill 0.3)
  Top 0.152: J43.2 78.1,70.87 77.72,71.25 77.72,71.88 77.38,72.22 C17.1 76.42,72.19 75.18,72.19 | 72.97,67.65 U9.1 74.82,70.37 75.18,70.74 75.18,72.19 | 72.97,67.65 C18.1 | J42.2 67.56,65.45 67.98,65.87 67.98,66.29 | J41.2 64.52,71.87 65.02,71.37 v65.02,67.56 R44.2 67.98,66.29 | 72.97,67.65 72.97,66.62 72.64,66.29 67.98,66.29 | U9.11 75,72.37 75.18,72.19 | R45.2 62.7,62.06 v62.48,61.85
  Bottom 0.152: v65.02,67.56 61.98,67.56 | 61.98,67.56 JP63.2 61.98,62.1 62.23,61.85 v62.48,61.85 | 61.98,67.56 61.98,68.07 61.21,68.83 61.21,76.71 62.1,77.6 70.99,77.6 71.37,77.22 I2C8.2
!INT  (via drill 0.3)
  Top 0.152: U2.7 16.49,20.56 15.75,19.81 v15.75,19.56 15.75,19.05 15.41,18.71 R1.1
  Bottom 0.152: J5.1 23.37,13.21 22.1,14.48 17.02,14.48 15.75,15.75 v15.75,19.56
!INT1  (via drill 0.3)
  Top 0.152: U1.7 42.4,20.56 41.66,19.81 v41.66,19.56 41.66,19.05 41.31,18.71 R8.1
  Bottom 0.152: J9.1 49.28,13.21 48.01,14.48 42.93,14.48 41.66,15.75 v41.66,19.56
!INT2  (via drill 0.3)
  Top 0.152: U3.7 68.31,20.56 67.56,19.81 v67.56,19.56 67.56,19.05 67.22,18.71 R13.1
  Bottom 0.152: J14.1 75.18,13.21 73.91,14.48 68.83,14.48 67.56,15.75 v67.56,19.56
!INT3  (via drill 0.3)
  Top 0.152: U4.7 16.49,46.47 15.75,45.72 v15.75,45.47 15.75,44.96 15.41,44.62 R18.1
  Bottom 0.152: J19.1 23.37,39.12 22.1,40.39 17.02,40.39 15.75,41.66 v15.75,45.47
!INT4  (via drill 0.3)
  Top 0.152: U5.7 42.4,46.47 41.66,45.72 v41.66,45.47 41.66,44.96 41.31,44.62 R23.1
  Bottom 0.152: J24.1 49.28,39.12 48.01,40.39 42.93,40.39 41.66,41.66 v41.66,45.47
!INT5  (via drill 0.3)
  Top 0.152: U6.7 68.31,46.47 67.56,45.72 v67.56,45.47 67.56,44.96 67.22,44.62 R28.1
  Bottom 0.152: J29.1 75.18,39.12 73.91,40.39 68.83,40.39 67.56,41.66 v67.56,45.47
!INT6  (via drill 0.3)
  Top 0.152: U7.7 16.49,72.37 15.75,71.63 v15.75,71.37 15.75,70.87 15.41,70.52 R33.1
  Bottom 0.152: J34.1 23.37,65.02 22.1,66.29 17.02,66.29 15.75,67.56 v15.75,71.37
!INT7  (via drill 0.3)
  Top 0.152: U8.7 42.4,72.37 41.66,71.63 v41.66,71.37 41.66,70.87 41.31,70.52 R38.1
  Bottom 0.152: J39.1 49.28,65.02 48.01,66.29 42.93,66.29 41.66,67.56 v41.66,71.37
!INT8  (via drill 0.3)
  Top 0.152: U9.7 68.31,72.37 67.56,71.63 v67.56,71.37 67.56,70.87 67.22,70.52 R43.1
  Bottom 0.152: J44.1 75.18,65.02 73.91,66.29 68.83,66.29 67.56,67.56 v67.56,71.37
!SHUT  (via drill 0.3)
  Top 0.152: U2.5 17.96,17.07 17.87,16.98 R2.1 v19.56,15.75
  Bottom 0.152: v19.56,15.75 24.64,15.75 25.91,14.48 J1.1
!SHUT1  (via drill 0.3)
  Top 0.152: U1.5 43.87,17.07 43.78,16.98 R9.1 v45.47,15.75
  Bottom 0.152: v45.47,15.75 50.55,15.75 51.82,14.48 J10.1
!SHUT2  (via drill 0.3)
  Top 0.152: U3.5 69.77,17.07 69.68,16.98 R14.1 v71.37,15.75
  Bottom 0.152: v71.37,15.75 76.45,15.75 77.72,14.48 J15.1
!SHUT3  (via drill 0.3)
  Top 0.152: U4.5 17.96,42.98 17.87,42.89 R19.1 v19.56,41.66
  Bottom 0.152: v19.56,41.66 24.64,41.66 25.91,40.39 J20.1
!SHUT4  (via drill 0.3)
  Top 0.152: U5.5 43.87,42.98 43.78,42.89 R24.1 v45.47,41.66
  Bottom 0.152: v45.47,41.66 50.55,41.66 51.82,40.39 J25.1
!SHUT5  (via drill 0.3)
  Top 0.152: U6.5 69.77,42.98 69.68,42.89 R29.1 v71.37,41.66
  Bottom 0.152: v71.37,41.66 76.45,41.66 77.72,40.39 J30.1
!SHUT6  (via drill 0.3)
  Top 0.152: U7.5 17.96,68.89 17.87,68.8 R34.1 v19.56,67.56
  Bottom 0.152: v19.56,67.56 24.64,67.56 25.91,66.29 J35.1
!SHUT7  (via drill 0.3)
  Top 0.152: U8.5 43.87,68.89 43.78,68.8 R39.1 v45.47,67.56
  Bottom 0.152: v45.47,67.56 50.55,67.56 51.82,66.29 J40.1
!SHUT8  (via drill 0.3)
  Top 0.152: U9.5 69.77,68.89 69.68,68.8 R44.1 v71.37,67.56
  Bottom 0.152: v71.37,67.56 76.45,67.56 77.72,66.29 J45.1
GND  (via drill 0.3)
  Top 0.152: J2.1 12.8,21.06 13.21,21.46 15.11,21.46 v15.75,20.83
  other vias: 19.56,19.56 24.64,17.02 17.02,10.67 25.91,23.37 19.56,17.02
  pour Bottom (isolate 0.305): 6.86,6.86 6.86,32.26 32.26,32.26 32.26,6.86
  pour Top (isolate 0.305): 6.86,6.86 6.86,32.26 32.26,32.26 32.26,6.86
GND1  (via drill 0.3)
  Top 0.152: J6.1 38.71,21.06 39.12,21.46 41.02,21.46 v41.66,20.83
  other vias: 45.47,19.56 50.55,17.02 42.93,10.67 51.82,23.37 45.47,17.02
  pour Bottom (isolate 0.305): 32.77,6.86 32.77,32.26 58.17,32.26 58.17,6.86
  pour Top (isolate 0.305): 32.77,6.86 32.77,32.26 58.17,32.26 58.17,6.86
GND2  (via drill 0.3)
  Top 0.152: J11.1 64.62,21.06 65.02,21.46 66.93,21.46 v67.56,20.83
  other vias: 71.37,19.56 76.45,17.02 68.83,10.67 77.72,23.37 71.37,17.02
  pour Bottom (isolate 0.305): 58.67,6.86 58.67,32.26 84.07,32.26 84.07,6.86
  pour Top (isolate 0.305): 58.67,6.86 58.67,32.26 84.07,32.26 84.07,6.86
GND3  (via drill 0.3)
  Top 0.152: J16.1 12.8,46.97 13.21,47.37 15.11,47.37 v15.75,46.74
  other vias: 19.56,45.47 24.64,42.93 17.02,36.58 25.91,49.28 19.56,42.93
  pour Bottom (isolate 0.305): 6.86,32.77 6.86,58.17 32.26,58.17 32.26,32.77
  pour Top (isolate 0.305): 6.86,32.77 6.86,58.17 32.26,58.17 32.26,32.77
GND4  (via drill 0.3)
  Top 0.152: J21.1 38.71,46.97 39.12,47.37 41.02,47.37 v41.66,46.74
  other vias: 45.47,45.47 50.55,42.93 42.93,36.58 51.82,49.28 45.47,42.93
  pour Bottom (isolate 0.305): 32.77,32.77 32.77,58.17 58.17,58.17 58.17,32.77
  pour Top (isolate 0.305): 32.77,32.77 32.77,58.17 58.17,58.17 58.17,32.77
GND5  (via drill 0.3)
  Top 0.152: J26.1 64.62,46.97 65.02,47.37 66.93,47.37 v67.56,46.74
  other vias: 71.37,45.47 76.45,42.93 68.83,36.58 77.72,49.28 71.37,42.93
  pour Bottom (isolate 0.305): 58.67,32.77 58.67,58.17 84.07,58.17 84.07,32.77
  pour Top (isolate 0.305): 58.67,32.77 58.67,58.17 84.07,58.17 84.07,32.77
GND6  (via drill 0.3)
  Top 0.152: J31.1 12.8,72.87 13.21,73.28 15.11,73.28 v15.75,72.64
  other vias: 19.56,71.37 24.64,68.83 17.02,62.48 25.91,75.18 19.56,68.83
  pour Bottom (isolate 0.305): 6.86,58.67 6.86,84.07 32.26,84.07 32.26,58.67
  pour Top (isolate 0.305): 6.86,58.67 6.86,84.07 32.26,84.07 32.26,58.67
GND7  (via drill 0.3)
  Top 0.152: J36.1 38.71,72.87 39.12,73.28 41.02,73.28 v41.66,72.64
  other vias: 45.47,71.37 50.55,68.83 42.93,62.48 51.82,75.18 45.47,68.83
  pour Bottom (isolate 0.305): 32.77,58.67 32.77,84.07 58.17,84.07 58.17,58.67
  pour Top (isolate 0.305): 32.77,58.67 32.77,84.07 58.17,84.07 58.17,58.67
GND8  (via drill 0.3)
  Top 0.152: J41.1 64.62,72.87 65.02,73.28 66.93,73.28 v67.56,72.64
  other vias: 71.37,71.37 76.45,68.83 68.83,62.48 77.72,75.18 71.37,68.83
  pour Bottom (isolate 0.305): 58.67,58.67 58.67,84.07 84.07,84.07 84.07,58.67
  pour Top (isolate 0.305): 58.67,58.67 58.67,84.07 84.07,84.07 84.07,58.67
N$1  (via drill 0.3)
  Top 0.152: R5.2 v22.95,24.93
  Bottom 0.152: I2C.1 21.38,23.37 v22.95,24.93
N$2  (via drill 0.3)
  Top 0.152: R4.2 v16.17,24.55
  Bottom 0.152: I2C.3 18.54,25.02 18.29,25.27 16.38,25.27 16.17,25.06 v16.17,24.55
N$3
  Top 0.152: D1.A 9.16,11.58 R3.1
N$4  (via drill 0.3)
  Top 0.152: R1.2 13.63,20.41 v13.46,20.57
  Bottom 0.152: 13.72,20.32 v13.46,20.57 14.1,19.94 14.1,14.35 12.95,13.21 JP9.1
N$5  (via drill 0.3)
  Top 0.152: R7.2 v48.86,24.93
  Bottom 0.152: I2C1.1 47.29,23.37 v48.86,24.93
N$6  (via drill 0.3)
  Top 0.152: R6.2 v42.08,24.55
  Bottom 0.152: I2C1.3 44.45,25.02 44.2,25.27 42.29,25.27 42.08,25.06 v42.08,24.55
N$7  (via drill 0.3)
  Top 0.152: R8.2 39.54,20.41 v39.37,20.57
  Bottom 0.152: 39.62,20.32 v39.37,20.57 40,19.94 40,14.35 38.86,13.21 JP14.1
N$8
  Top 0.152: D2.A 35.06,11.58 R10.1
N$9  (via drill 0.3)
  Top 0.152: R12.2 v74.76,24.93
  Bottom 0.152: I2C2.1 73.2,23.37 v74.76,24.93
N$10  (via drill 0.3)
  Top 0.152: R11.2 v67.98,24.55
  Bottom 0.152: I2C2.3 70.36,25.02 70.1,25.27 68.2,25.27 67.98,25.06 v67.98,24.55
N$11  (via drill 0.3)
  Top 0.152: R13.2 65.44,20.41 v65.28,20.57
  Bottom 0.152: 65.53,20.32 v65.28,20.57 65.91,19.94 65.91,14.35 64.77,13.21 JP21.1
N$12
  Top 0.152: D3.A 60.97,11.58 R15.1
N$13  (via drill 0.3)
  Top 0.152: R17.2 v22.95,50.84
  Bottom 0.152: I2C3.1 21.38,49.28 v22.95,50.84
N$14  (via drill 0.3)
  Top 0.152: R16.2 v16.17,50.46
  Bottom 0.152: I2C3.3 18.54,50.93 18.29,51.18 16.38,51.18 16.17,50.97 v16.17,50.46
N$15  (via drill 0.3)
  Top 0.152: R18.2 13.63,46.32 v13.46,46.48
  Bottom 0.152: 13.72,46.23 v13.46,46.48 14.1,45.85 14.1,40.26 12.95,39.12 JP28.1
N$16
  Top 0.152: D4.A 9.16,37.49 R20.1
N$17  (via drill 0.3)
  Top 0.152: R22.2 v48.86,50.84
  Bottom 0.152: I2C4.1 47.29,49.28 v48.86,50.84
N$18  (via drill 0.3)
  Top 0.152: R21.2 v42.08,50.46
  Bottom 0.152: I2C4.3 44.45,50.93 44.2,51.18 42.29,51.18 42.08,50.97 v42.08,50.46
N$19  (via drill 0.3)
  Top 0.152: R23.2 39.54,46.32 v39.37,46.48
  Bottom 0.152: 39.62,46.23 v39.37,46.48 40,45.85 40,40.26 38.86,39.12 JP35.1
N$20
  Top 0.152: D5.A 35.06,37.49 R25.1
N$21  (via drill 0.3)
  Top 0.152: R27.2 v74.76,50.84
  Bottom 0.152: I2C5.1 73.2,49.28 v74.76,50.84
N$22  (via drill 0.3)
  Top 0.152: R26.2 v67.98,50.46
  Bottom 0.152: I2C5.3 70.36,50.93 70.1,51.18 68.2,51.18 67.98,50.97 v67.98,50.46
N$23  (via drill 0.3)
  Top 0.152: R28.2 65.44,46.32 v65.28,46.48
  Bottom 0.152: 65.53,46.23 v65.28,46.48 65.91,45.85 65.91,40.26 64.77,39.12 JP42.1
N$24
  Top 0.152: D6.A 60.97,37.49 R30.1
N$25  (via drill 0.3)
  Top 0.152: R32.2 v22.95,76.75
  Bottom 0.152: I2C6.1 21.38,75.18 v22.95,76.75
N$26  (via drill 0.3)
  Top 0.152: R31.2 v16.17,76.37
  Bottom 0.152: I2C6.3 18.54,76.84 18.29,77.09 16.38,77.09 16.17,76.87 v16.17,76.37
N$27  (via drill 0.3)
  Top 0.152: R33.2 13.63,72.22 v13.46,72.39
  Bottom 0.152: 13.72,72.14 v13.46,72.39 14.1,71.76 14.1,66.17 12.95,65.02 JP49.1
N$28
  Top 0.152: D7.A 9.16,63.4 R35.1
N$29  (via drill 0.3)
  Top 0.152: R37.2 v48.86,76.75
  Bottom 0.152: I2C7.1 47.29,75.18 v48.86,76.75
N$30  (via drill 0.3)
  Top 0.152: R36.2 v42.08,76.37
  Bottom 0.152: I2C7.3 44.45,76.84 44.2,77.09 42.29,77.09 42.08,76.87 v42.08,76.37
N$31  (via drill 0.3)
  Top 0.152: R38.2 39.54,72.22 v39.37,72.39
  Bottom 0.152: 39.62,72.14 v39.37,72.39 40,71.76 40,66.17 38.86,65.02 JP56.1
N$32
  Top 0.152: D8.A 35.06,63.4 R40.1
N$33  (via drill 0.3)
  Top 0.152: R42.2 v74.76,76.75
  Bottom 0.152: I2C8.1 73.2,75.18 v74.76,76.75
N$34  (via drill 0.3)
  Top 0.152: R41.2 v67.98,76.37
  Bottom 0.152: I2C8.3 70.36,76.84 70.1,77.09 68.2,77.09 67.98,76.87 v67.98,76.37
N$35  (via drill 0.3)
  Top 0.152: R43.2 65.44,72.22 v65.28,72.39
  Bottom 0.152: 65.53,72.14 v65.28,72.39 65.91,71.76 65.91,66.17 64.77,65.02 JP63.1
N$36
  Top 0.152: D9.A 60.97,63.4 R45.1
SCL
  Top 0.152: 21.21,22.1 25.53,22.1 26.57,21.06 J4.4 28.6,21.06 29.21,20.45 29.21,16.51 J3.4 | 21.21,22.1 20.32,22.1 | 20.32,22.1 10.67,22.1 9.4,20.83 9.4,18.8 10.14,18.06 J2.4 | U2.10 20.36,22.06 20.32,22.1 | R5.1 21.25,22.14 21.21,22.1
SCL1
  Top 0.152: 47.12,22.1 51.43,22.1 52.47,21.06 J8.4 54.51,21.06 55.12,20.45 55.12,16.51 J7.4 | 47.12,22.1 46.23,22.1 | 46.23,22.1 36.58,22.1 35.31,20.83 35.31,18.8 36.04,18.06 J6.4 | U1.10 46.27,22.06 46.23,22.1 | R7.1 47.16,22.14 47.12,22.1
SCL2
  Top 0.152: 73.03,22.1 77.34,22.1 78.38,21.06 J13.4 80.42,21.06 81.03,20.45 81.03,16.51 J12.4 | 73.03,22.1 72.14,22.1 | 72.14,22.1 62.48,22.1 61.21,20.83 61.21,18.8 61.95,18.06 J11.4 | U3.10 72.17,22.06 72.14,22.1 | R12.1 73.06,22.14 73.03,22.1
SCL3
  Top 0.152: 21.21,48.01 25.53,48.01 26.57,46.97 J18.4 28.6,46.97 29.21,46.35 29.21,42.42 J17.4 | 21.21,48.01 20.32,48.01 | 20.32,48.01 10.67,48.01 9.4,46.74 9.4,44.7 10.14,43.97 J16.4 | U4.10 20.36,47.97 20.32,48.01 | R17.1 21.25,48.04 21.21,48.01
SCL4
  Top 0.152: 47.12,48.01 51.43,48.01 52.47,46.97 J23.4 54.51,46.97 55.12,46.35 55.12,42.42 J22.4 | 47.12,48.01 46.23,48.01 | 46.23,48.01 36.58,48.01 35.31,46.74 35.31,44.7 36.04,43.97 J21.4 | U5.10 46.27,47.97 46.23,48.01 | R22.1 47.16,48.04 47.12,48.01
SCL5
  Top 0.152: 73.03,48.01 77.34,48.01 78.38,46.97 J28.4 80.42,46.97 81.03,46.35 81.03,42.42 J27.4 | 73.03,48.01 72.14,48.01 | 72.14,48.01 62.48,48.01 61.21,46.74 61.21,44.7 61.95,43.97 J26.4 | U6.10 72.17,47.97 72.14,48.01 | R27.1 73.06,48.04 73.03,48.01
SCL6
  Top 0.152: 21.21,73.91 25.53,73.91 26.57,72.87 J33.4 28.6,72.87 29.21,72.26 29.21,68.33 J32.4 | 21.21,73.91 20.32,73.91 | 20.32,73.91 10.67,73.91 9.4,72.64 9.4,70.61 10.14,69.87 J31.4 | U7.10 20.36,73.88 20.32,73.91 | R32.1 21.25,73.95 21.21,73.91
SCL7
  Top 0.152: 47.12,73.91 51.43,73.91 52.47,72.87 J38.4 54.51,72.87 55.12,72.26 55.12,68.33 J37.4 | 47.12,73.91 46.23,73.91 | 46.23,73.91 36.58,73.91 35.31,72.64 35.31,70.61 36.04,69.87 J36.4 | U8.10 46.27,73.88 46.23,73.91 | R37.1 47.16,73.95 47.12,73.91
SCL8
  Top 0.152: 73.03,73.91 77.34,73.91 78.38,72.87 J43.4 80.42,72.87 81.03,72.26 81.03,68.33 J42.4 | 73.03,73.91 72.14,73.91 | 72.14,73.91 62.48,73.91 61.21,72.64 61.21,70.61 61.95,69.87 J41.4 | U9.10 72.17,73.88 72.14,73.91 | R42.1 73.06,73.95 73.03,73.91
SDA  (via drill 0.3)
  Top 0.152: v25.15,21.46 26.55,20.06 J4.3 28.07,20.06 28.45,19.68 28.45,17.02 27.18,15.75 25.91,15.75 J3.3 | J2.3 10.79,19.06 v10.29,19.56 | R4.1 17.87,24.3 17.53,24.64 v17.02,24.64 | U2.9 19.56,20.95 19.05,21.46 v17.02,21.46
  Bottom 0.152: v10.29,19.56 10.29,20.45 11.3,21.46 v17.02,21.46 | v25.15,21.46 v17.02,21.46 | v17.02,24.64 v17.02,21.46
SDA1  (via drill 0.3)
  Top 0.152: v51.05,21.46 52.46,20.06 J8.3 53.98,20.06 54.36,19.68 54.36,17.02 53.09,15.75 51.82,15.75 J7.3 | J6.3 36.7,19.06 v36.2,19.56 | R6.1 43.78,24.3 43.43,24.64 v42.93,24.64 | U1.9 45.47,20.95 44.96,21.46 v42.93,21.46
  Bottom 0.152: v36.2,19.56 36.2,20.45 37.21,21.46 v42.93,21.46 | v51.05,21.46 v42.93,21.46 | v42.93,24.64 v42.93,21.46
SDA2  (via drill 0.3)
  Top 0.152: v76.96,21.46 78.37,20.06 J13.3 79.89,20.06 80.26,19.68 80.26,17.02 78.99,15.75 77.72,15.75 J12.3 | J11.3 62.6,19.06 v62.1,19.56 | R11.1 69.68,24.3 69.34,24.64 v68.83,24.64 | U3.9 71.37,20.95 70.87,21.46 v68.83,21.46
  Bottom 0.152: v62.1,19.56 62.1,20.45 63.12,21.46 v68.83,21.46 | v76.96,21.46 v68.83,21.46 | v68.83,24.64 v68.83,21.46
SDA3  (via drill 0.3)
  Top 0.152: v25.15,47.37 26.55,45.97 J18.3 28.07,45.97 28.45,45.59 28.45,42.93 27.18,41.66 25.91,41.66 J17.3 | J16.3 10.79,44.97 v10.29,45.47 | R16.1 17.87,50.2 17.53,50.55 v17.02,50.55 | U4.9 19.56,46.86 19.05,47.37 v17.02,47.37
  Bottom 0.152: v10.29,45.47 10.29,46.35 11.3,47.37 v17.02,47.37 | v25.15,47.37 v17.02,47.37 | v17.02,50.55 v17.02,47.37
SDA4  (via drill 0.3)
  Top 0.152: v51.05,47.37 52.46,45.97 J23.3 53.98,45.97 54.36,45.59 54.36,42.93 53.09,41.66 51.82,41.66 J22.3 | J21.3 36.7,44.97 v36.2,45.47 | R21.1 43.78,50.2 43.43,50.55 v42.93,50.55 | U5.9 45.47,46.86 44.96,47.37 v42.93,47.37
  Bottom 0.152: v36.2,45.47 36.2,46.35 37.21,47.37 v42.93,47.37 | v51.05,47.37 v42.93,47.37 | v42.93,50.55 v42.93,47.37
SDA5  (via drill 0.3)
  Top 0.152: v76.96,47.37 78.37,45.97 J28.3 79.89,45.97 80.26,45.59 80.26,42.93 78.99,41.66 77.72,41.66 J27.3 | J26.3 62.6,44.97 v62.1,45.47 | R26.1 69.68,50.2 69.34,50.55 v68.83,50.55 | U6.9 71.37,46.86 70.87,47.37 v68.83,47.37
  Bottom 0.152: v62.1,45.47 62.1,46.35 63.12,47.37 v68.83,47.37 | v76.96,47.37 v68.83,47.37 | v68.83,50.55 v68.83,47.37
SDA6  (via drill 0.3)
  Top 0.152: v25.15,73.28 26.55,71.87 J33.3 28.07,71.87 28.45,71.5 28.45,68.83 27.18,67.56 25.91,67.56 J32.3 | J31.3 10.79,70.87 v10.29,71.37 | R31.1 17.87,76.11 17.53,76.45 v17.02,76.45 | U7.9 19.56,72.77 19.05,73.28 v17.02,73.28
  Bottom 0.152: v10.29,71.37 10.29,72.26 11.3,73.28 v17.02,73.28 | v25.15,73.28 v17.02,73.28 | v17.02,76.45 v17.02,73.28
SDA7  (via drill 0.3)
  Top 0.152: v51.05,73.28 52.46,71.87 J38.3 53.98,71.87 54.36,71.5 54.36,68.83 53.09,67.56 51.82,67.56 J37.3 | J36.3 36.7,70.87 v36.2,71.37 | R36.1 43.78,76.11 43.43,76.45 v42.93,76.45 | U8.9 45.47,72.77 44.96,73.28 v42.93,73.28
  Bottom 0.152: v36.2,71.37 36.2,72.26 37.21,73.28 v42.93,73.28 | v51.05,73.28 v42.93,73.28 | v42.93,76.45 v42.93,73.28
SDA8  (via drill 0.3)
  Top 0.152: v76.96,73.28 78.37,71.87 J43.3 79.89,71.87 80.26,71.5 80.26,68.83 78.99,67.56 77.72,67.56 J42.3 | J41.3 62.6,70.87 v62.1,71.37 | R41.1 69.68,76.11 69.34,76.45 v68.83,76.45 | U9.9 71.37,72.77 70.87,73.28 v68.83,73.28
  Bottom 0.152: v62.1,71.37 62.1,72.26 63.12,73.28 v68.83,73.28 | v76.96,73.28 v68.83,73.28 | v68.83,76.45 v68.83,73.28

## Text on the board
Bottom: X02 | X02 | X02 | X02 | X02 | X02 | X02 | X02 | X02